# Altium PCB MecaVac.PcbDoc
Units mil, origin at the board's own origin, x right, y up, seen from the top; angles counter-clockwise.
Board outline 6000 x 4000 mil, 2 copper layers (Top Layer, Bottom Layer); 65 components, 40 nets, 194 pads, 0 vias.
Unrouted connection lines stored in the file: 136.
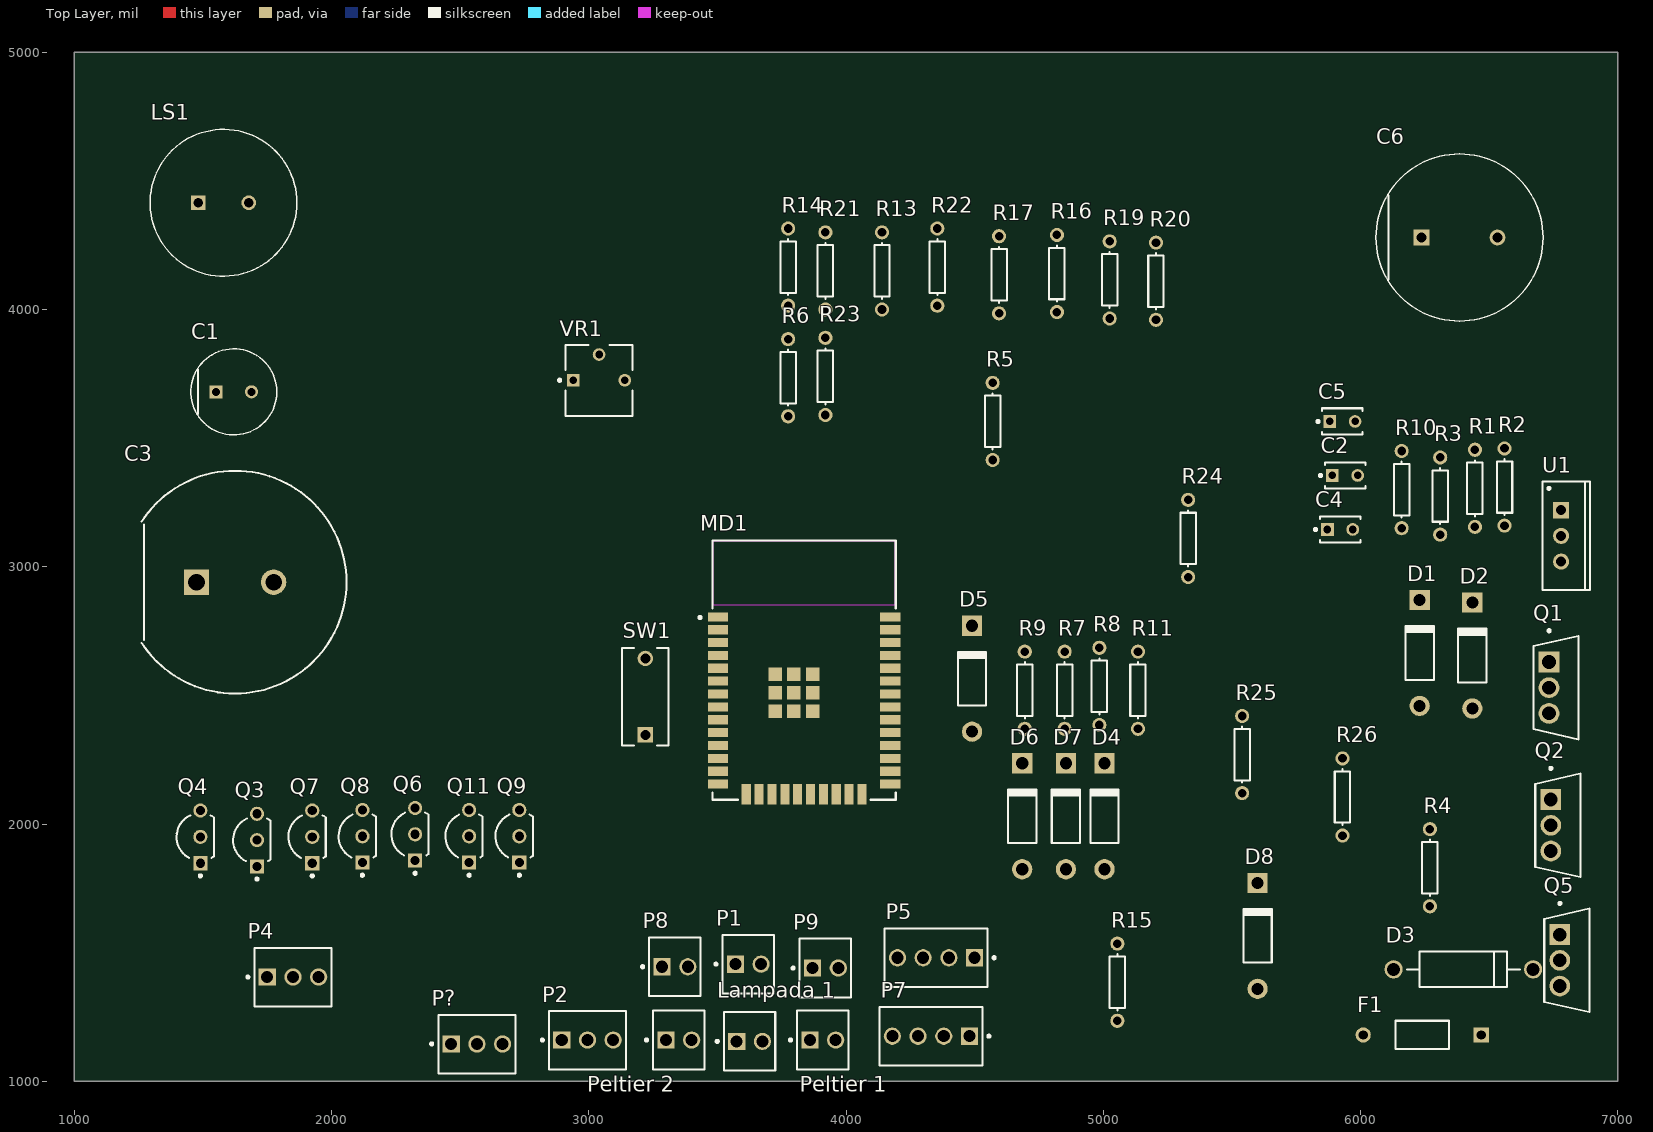
[diagram p0: Top Layer view]
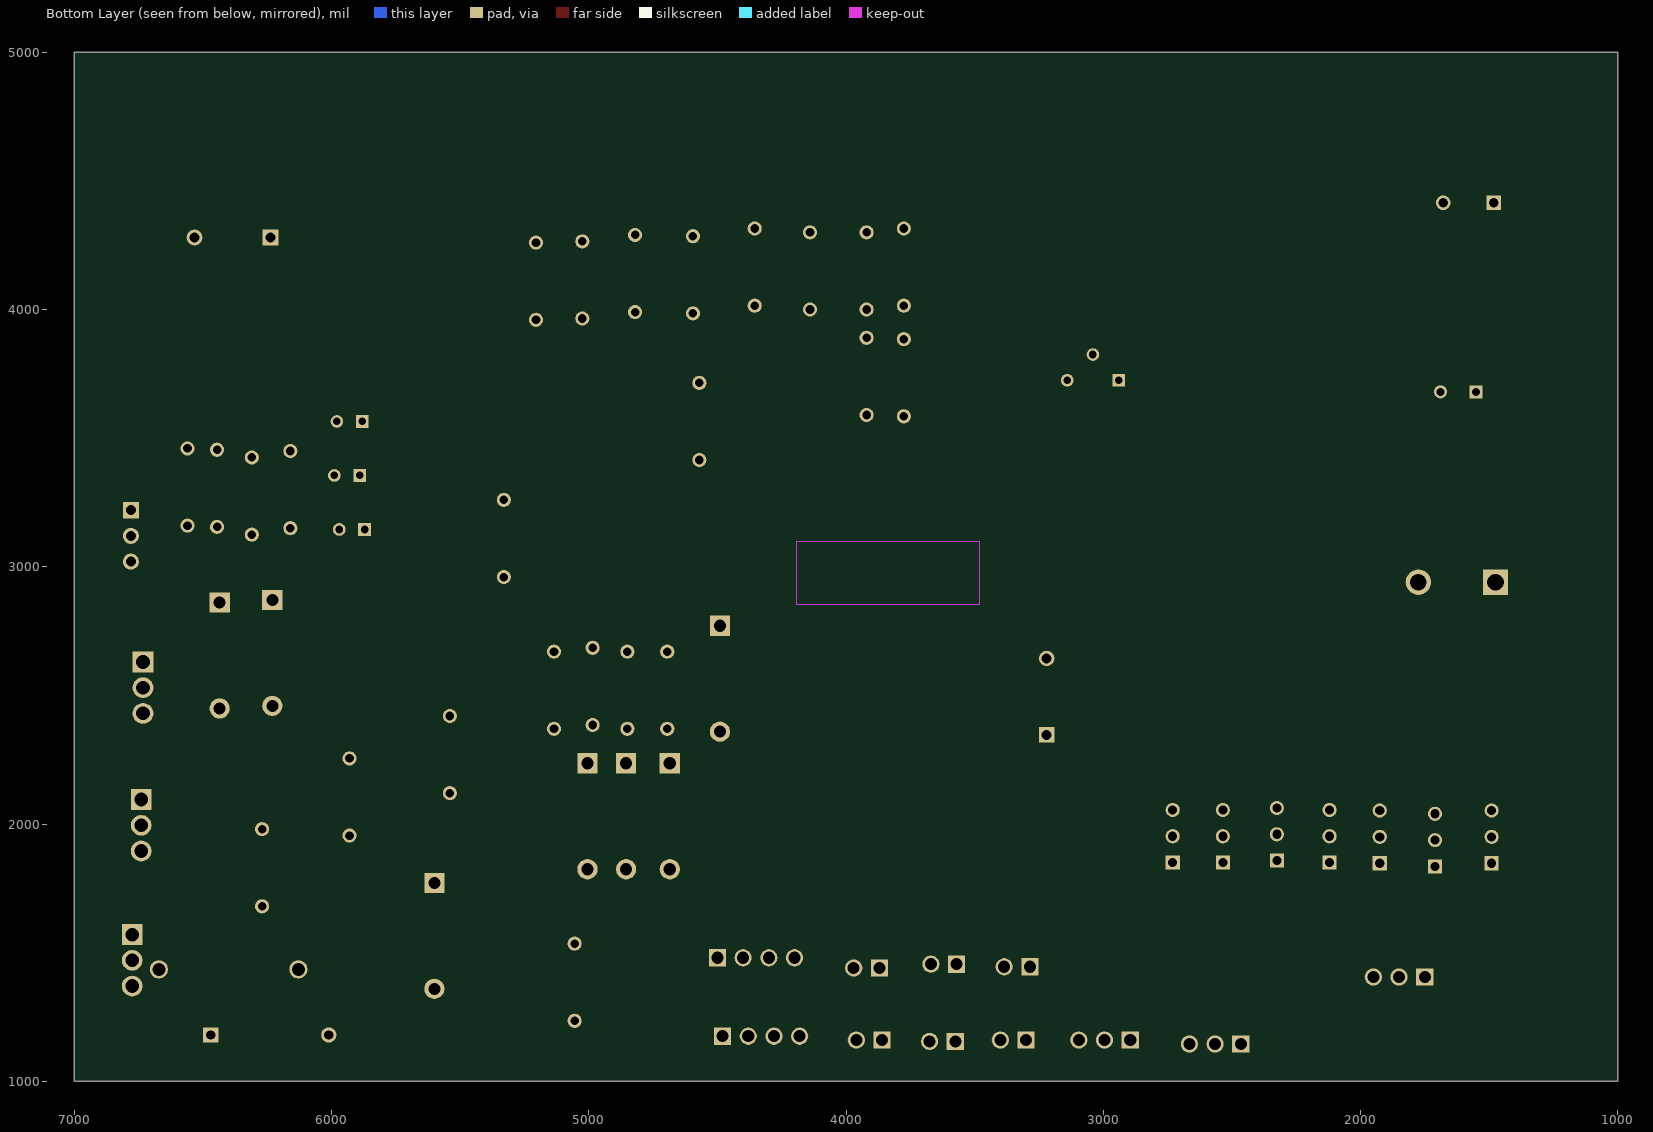
[diagram p1: Bottom Layer view, seen from below]

## Layer stack, top to bottom
Top Solder: solder mask 0.4, Solder Resist, Dk 3.5
Top Layer: signal copper 1.4
Dielectric 1: dielectric 12.6, FR-4, Dk 4.8
Bottom Layer: signal copper 1.4
Bottom Solder: solder mask 0.4, Solder Resist, Dk 3.5

## Board outline
1000,1000 7000,1000 7000,5000 1000,5000

## Design rules (kind name [scope] priority, off if disabled: settings)
Clearance [All] p1: gap=10 ignorepadtopadclearanceinfootprint=FALSE except(0: Arc-Hole Track-Hole SMDPad-Hole THPad-Hole Via-Hole Fill-Hole Poly-Hole Region-Hole Text-Hole)
PolygonConnect [All] p1: connectstyle=Relief reliefconductorwidth=10 reliefentries=4 polygonreliefangle="90 Angle" airgapwidth=10
RoutingVias [All] p1: holewidth=28 width=50 viastyle="Through Hole" minholewidth=28 minwidth=50 maxholewidth=28 maxwidth=50
SolderMaskExpansion [All] p1: expansion=4 istentingtop=FALSE
Width [All] p1: maxlimit=10 minlimit=10 preferedwidth=10
30 further rules are at their usual default settings.

## Components (designator, comment, footprint, x,y, rotation, side; value= is the part's Value field where it differs from the comment)
C1 "100uF" FP-RAD-TH-D_8_0_5-L_11_5-MFG 1620,3680 r0 top
C2 "10uF" VISH-K104K15X7RF5TL2 5940,3355 r0 top
C3 "1F" FP-FR0H105ZF-MFG 1625,2940 r0 top
C4 "10uF" VISH-K104K15X7RF5TL2 5920.79,3145 r0 top
C5 "10uF" VISH-K104K15X7RF5TL2 5930,3565 r0 top
C6 "10mF" FP-RAD-TH-D_16_0_5-L_25_2-MFG 6385,4280 r0 top
D1 "1N4007" DO-41 6230,2665 r90 top
D2 "1N4007" DO-41 6435,2655 r90 top
D3 "P6KE200A" ONSC-SURMETIC40-2-017AA-01 6400,1435 r180 top
D4 "1N4007" DO-41 5005,2030 r90 top
D5 "1N4007" DO-41 4490,2565 r90 top
D6 "1N4007" DO-41 4685,2030 r90 top
D7 "1N4007" DO-41 4855,2030 r90 top
D8 "1N4007" DO-41 5600,1565 r90 top
F1 "Fuse 1" PIN-W2/E2.8 6240,1180 r180 top
"Lampada 1" "22-27-2021" MOLX-22-27-2021_V 3625,1155 r0 top
LS1 "PS1440P02BT" FP-PS1440P02BT-MFG 1580,4415 r0 top
MD1 "ESP32-WROOM-32D" FP-ESP32-WROOM-32D-MFG 3837.13,2598.19 r0 top
P1 "Power" MOLX-22-27-2021_V 3620,1455 r0 top
P2 "Comunicação Processador" MOLX-22-27-2031_V 2995,1160 r0 top
P4 "Sensores Termicos, DS18B20" MOLX-22-27-2031_V 1850,1405 r0 top
P5 "I2C" MOLX-22-27-2041_V 4350,1480 r0 top
P7 "LED" MOLX-22-27-2041_V 4330,1175 r0 top
P8 "Botão" MOLX-22-27-2021_V 3335,1445 r0 top
P9 "Micro Switch" MOLX-22-27-2021_V 3920,1440 r0 top
P? "Sensores Magnéticos" MOLX-22-27-2031_V 2565,1145 r0 top
"Peltier 1" "22-27-2021" MOLX-22-27-2021_V 3910,1160 r0 top
"Peltier 2" "22-27-2021" MOLX-22-27-2021_V 3350,1160 r0 top
Q1 "IRF1404" FP-X15-0364-MFG 6760,2530 r0 top
Q2 "IRF1404" FP-X15-0364-MFG 6766.97,1995 r0 top
Q3 "MPSA56RLRAG" ONSC-TO-92-3-29-11_AM_BL 1710,1937.36 r90 top
Q4 "BC546BZL1G" ONSC-TO-92-3-29-11_AM_BL 1490,1950 r90 top
Q5 "IRF740PBF" FP-X15-0364-MFG 6801.97,1470 r0 top
Q6 "BC546BZL1G" ONSC-TO-92-3-29-11_AM_BL 2325,1960 r90 top
Q7 "BC546BZL1G" ONSC-TO-92-3-29-11_AM_BL 1925,1950 r90 top
Q8 "BC546BZL1G" ONSC-TO-92-3-29-11_AM_BL 2120,1952.36 r90 top
Q9 "BC546BZL1G" ONSC-TO-92-3-29-11_AM_BL 2730,1952.36 r90 top
Q11 "MPSA56RLRAG" ONSC-TO-92-3-29-11_AM_BL 2535,1952.36 r90 top
R1 "Res1" AXIAL-0.3 6445,3305 r90 top value=10K
R2 "Res1" AXIAL-0.3 6560,3310 r90 top value=10K
R3 "Res1" AXIAL-0.3 6310,3275 r90 top value=1K
R4 "Res1" AXIAL-0.3 6270,1830 r90 top value=1K
R5 "Res1" AXIAL-0.3 4570,3565 r90 top value=10k
R6 "Res1" AXIAL-0.3 3775,3735 r90 top value=10k
R7 "Res1" AXIAL-0.3 4850,2520 r90 top value=110~220
R8 "Res1" AXIAL-0.3 4985,2535 r90 top value=110~220
R9 "Res1" AXIAL-0.3 4695,2520 r90 top value=10k
R10 "Res1" AXIAL-0.3 6160,3300 r90 top value=1K
R11 "Res1" AXIAL-0.3 5135,2520 r90 top value=10K
R13 "Res1" AXIAL-0.3 4140,4150 r90 top value=10K
R14 "Res1" AXIAL-0.3 3775,4165 r270 top value=110~1k
R15 "Res1" AXIAL-0.3 5055,1385 r90 top value=10K
R16 "Res1" AXIAL-0.3 4820,4140 r270 top value=330~750
R17 "Res1" AXIAL-0.3 4595,4135 r270 top value=330~750
R19 "Res1" AXIAL-0.3 5025,4115 r90 top value=10K
R20 "Res1" AXIAL-0.3 5205,4110 r90 top value=10K
R21 "Res1" AXIAL-0.3 3920,4150 r90 top value=10k
R22 "Res1" AXIAL-0.3 4355,4165 r270 top value=10K
R23 "Res1" AXIAL-0.3 3920,3740 r90 top value=56
R24 "Res1" AXIAL-0.3 5330,3110 r90 top value=10k
R25 "Res1" AXIAL-0.3 5540,2270 r90 top value=1k
R26 "Res1" AXIAL-0.3 5930,2105 r90 top value=10k
SW1 "BD01" FP-BD01-MFG 3220,2495 r0 top
U1 "LM1117T33" NEB0003A 6780,3120 r270 top
VR1 "1k" BOUR-3362P 3040,3723.62 r0 top

## Footprints (in the part's own frame and the unit in brackets; to place one, negate y for a bottom-side part, rotate by r counter-clockwise, add the part's x,y. Pads: shape width x height; smd on the part's side, far side on the other; paste and mask are expansions set on the pad)
AXIAL-0.3 [mm] "Axial Device, Thru-Hole; 2 Leads; 0.3 in Pin Spacing"
  round 1.4 hole 0.85: 1(-3.81,0) 2(3.81,0)
  silkscreen extent -2.77,-0.76 2.77,0.76
BOUR-3362P [mm] "THD, 3-Leads, Body 6.6x6.99mm, Pitch 2.54mm"
  rect 1.25x1.25 hole 0.75: 1(-2.54,0.035)
  round 1.25 hole 0.75: 2(0,2.575) 3(2.54,0.035)
  silkscreen extent -4.02,-3.49 3.3,3.49, body extent -3.3,-3.49 3.3,3.49, height 4.95
DO-41 [mm] "Diode, Axial; Body 5.2 x 2.7 mm (LxDia. max), Lead Dia. 0.86 mm (max)"
  round 2 hole 1.2: 1(-5.23,0)
  rect 2x2 hole 1.2: 2(5.23,0)
  silkscreen extent -2.65,-1.4 2.75,1.4
FP-BD01-MFG [mm]
  rect 1.52x1.52 hole 0.97 paste-1000 mask+0: 1(0,-3.775)
  round 1.52 hole 0.97 paste-1000 mask+0: 2(0,3.775)
  silkscreen extent -2.28,-4.82 2.28,4.82, body extent -2.38,-4.92 2.38,4.92, height 0.25
FP-ESP32-WROOM-32D-MFG [mm]
  rect 2x0.9 smd paste+0 mask+0: 1(-8.5,5.26) 2(-8.5,3.99) 3(-8.5,2.72) 4(-8.5,1.45) 5(-8.5,0.18) 6(-8.5,-1.09) 7(-8.5,-2.36) 8(-8.5,-3.63) 9(-8.5,-4.9) 10(-8.5,-6.17) 11(-8.5,-7.44) 12(-8.5,-8.71) 13(-8.5,-9.98) 14(-8.5,-11.25) 25(8.5,-11.25) 26(8.5,-9.98) 27(8.5,-8.71) 28(8.5,-7.44) 29(8.5,-6.17) 30(8.5,-4.9) 31(8.5,-3.63) 32(8.5,-2.36) 33(8.5,-1.09) 34(8.5,0.18) 35(8.5,1.45) 36(8.5,2.72) 37(8.5,3.99) 38(8.5,5.26)
  rect 0.9x2 smd paste+0 mask+0: 15(-5.715,-12.25) 16(-4.445,-12.25) 17(-3.175,-12.25) 18(-1.905,-12.25) 19(-0.635,-12.25) 20(0.635,-12.25) 21(1.905,-12.25) 22(3.175,-12.25) 23(4.445,-12.25) 24(5.715,-12.25)
  rect 1.33x1.33 smd paste+0 mask+0: 39(-2.835,-4.075) 39(-2.835,-2.24) 39(-2.835,-0.405) 39(-1,-4.075) 39(-1,-2.24) 39(-1,-0.405) 39(0.835,-4.075) 39(0.835,-2.24) 39(0.835,-0.405)
  Keep-Out Layer region: -9,6.45 9,6.45 9,12.75 -9,12.75
  Keep-Out Layer region: -9,6.45 9,6.45 9,12.75 -9,12.75
  silkscreen extent -10.4,-12.8 9.05,12.8, body extent -9.6,-13.35 9.6,12.9, height 0.25
FP-FR0H105ZF-MFG [mm]
  rect 2.5x2.5 hole 1.65 paste-1000 mask+0: 1(-3.81,0)
  round 2.5 hole 1.65 paste-1000 mask+0: 2(3.81,0)
  silkscreen extent -9.23,-11 11,11, body extent -11.1,-11.1 11.1,11.1, height 0.25
FP-PS1440P02BT-MFG [mm]
  rect 1.45x1.45 hole 0.95 paste-1000 mask+0: 1(-2.5,0)
  round 1.45 hole 0.95 paste-1000 mask+0: 2(2.5,0)
  silkscreen extent -7.25,-7.25 7.25,7.25, body extent -7.35,-7.35 7.35,7.35, height 0.25
FP-RAD-TH-D_8_0_5-L_11_5-MFG [mm]
  rect 1.3x1.3 hole 0.8 paste-1000 mask+0: 1(-1.75,0)
  round 1.3 hole 0.8 paste-1000 mask+0: 2(1.75,0)
  silkscreen extent -4.25,-4.25 4.25,4.25, body extent -4.35,-4.35 4.35,4.35, height 0.25
FP-RAD-TH-D_16_0_5-L_25_2-MFG [mm]
  rect 1.55x1.55 hole 1 paste-1000 mask+0: 1(-3.75,0)
  round 1.55 hole 1 paste-1000 mask+0: 2(3.75,0)
  silkscreen extent -8.25,-8.25 8.25,8.25, body extent -8.35,-8.35 8.35,8.35, height 0.25
FP-X15-0364-MFG [mm]
  rect 2.05x2.05 hole 1.35 paste-1000 mask+0: 1(-0.685,2.54)
  round 2.05 hole 1.35 paste-1000 mask+0: 2(-0.685,0) 3(-0.685,-2.54)
  silkscreen extent -2.22,-5.12 2.22,5.74, body extent -2.42,-5.36 2.42,5.36, height 0.25
MOLX-22-27-2021_V [mm] "Header, 2-Leads, Body 5.8x5.08mm"
  rect 1.7x1.7 hole 1.19: 1(-1.27,0)
  round 1.7 hole 1.19: 2(1.27,0)
  silkscreen extent -3.31,-2.9 2.54,2.9, body extent -2.54,-2.9 2.54,2.9, height 11.72
MOLX-22-27-2031_V [mm] "Header, 3-Leads, Body 7.62x5.8mm, Pitch 2.54mm"
  rect 1.7x1.7 hole 1.19 paste+0: 1(-2.54,0)
  round 1.7 hole 1.19 paste+0: 2(0,0) 3(2.54,0)
  silkscreen extent -4.58,-2.92 3.81,2.88, body extent -3.81,-2.92 3.81,2.88, height 11.71
MOLX-22-27-2041_V [mm] "CONN, 4-Leads, Body 10.16x5.8mm, Pitch 2.54mm"
  rect 1.7x1.7 hole 1.19: 1(3.81,0)
  round 1.7 hole 1.19: 2(1.27,0) 3(-1.27,0) 4(-3.81,0)
  silkscreen extent -5.08,-2.9 5.86,2.9, body extent -5.08,-2.9 5.08,2.9, height 11.7
NEB0003A [mm] "TO, Thru-Hole, Vertical, Heatsink Mounted; 3 In-Line Leads; Pitch 2.54 mm"
  rect 1.6x1.6 hole 1: 1(-2.54,0)
  round 1.6 hole 1: 2(0,0) 3(2.54,0)
  silkscreen extent -5.35,-1.85 5.35,2.85, body extent -4.96,-2.11 4.96,2.43, height 18.66
ONSC-SURMETIC40-2-017AA-01 [mm] "AXIAL, 2-Leads, Diameter 3.49mm"
  round 1.8 hole 1.3: 1(-6.888,0) 2(6.888,0)
  silkscreen extent -5.59,-1.74 5.59,1.74
ONSC-TO-92-3-29-11_AM_BL [mm] "TO, 3-Leads, Body Dia 4.7mm, Pitch 2.6mm"
  rect 1.4x1.4 hole 0.9: 1(-2.6,0)
  round 1.4 hole 0.9: 2(0,0) 3(2.6,0)
  silkscreen extent -3.97,-1.34 2.13,2.35, body extent -2.84,-1.34 2.84,2.35, height 5.33
PIN-W2/E2.8 [mm] "Thru-Hole; 2 Leads"
  rect 1.5x1.5 hole 0.9: 1(-5.825,0)
  round 1.5 hole 0.9: 2(5.825,0)
  silkscreen extent -2.65,-1.4 2.65,1.4
VISH-K104K15X7RF5TL2 [mm] "THD, 2-Leads, Body 4x2.6mm"
  rect 1.25x1.25 hole 0.75: 1(-1.25,0)
  round 1.25 hole 0.75: 2(1.25,0)
  silkscreen extent -2.55,-1.3 2,1.3, body extent -2,-1.3 2,1.3, height 5.6

## Part data
C1: library part CMP-05427-001264-1, "Aluminum Electrolytic Capacitors (Radial Lead Type) AEC-Q200 Qualified 120uF ±20% 35V", Capacitance=120uF, Case/Package=Radial, ESR (Equivalent Series Resistance)=117mR, Leakage Current=3uA, Max Operating Temperature=105°C, Min Operating Temperature=-55°C, Package Quantity=200, Ripple Current=555mA, Tolerance=10%, Voltage=35V, Construction=RADIAL, Contact Plating=Tin, Diameter=8mm, Height=11.5mm, Height - Seated (Max)=0.453inch, Impedance=117mR, Lead Diameter=0.6mm, Lead Free="Lead Free", Lead Pitch=3.5mm, Length=11.5mm, Life (Hours)=2000Hour, Mount="Through Hole", Number of Pins=2, Packaging=Bulk, Polarity=Polar, Radiation Hardening=No, REACH SVHC="No SVHC", Ripple Current (AC)=555mA, RoHS Compliant=Yes, Series=FC, Termination=Radial, Voltage rating=35V, Voltage Rating (DC)=35V
C2 C4 C5: library part CMP-2000-06508-1, "Ceramic Capacitor, 100 nF, +/- 10%, 50 V, -55 to 125 degC, 2-Pin THD, RoHS, Tape and Reel", Capacitance=0.1µF, Manufacturer=Vishay, Operating temperature=-55°C~125°C, Package / Case=Radial, Package Description="2-Pin Through Hole Device, Body 4 x 2.6 mm", Package Reference=K104K15X7RF5TL2, Ratings=-, Standard Package=1, Temperature Coefficient=X7R, Tolerance=±10%, Voltage - Rated=50V, Applications=GeneralPurpose, Catalog Drawings=Mono-KapSide2-15_5.58Mono-KapSide1_15, Category=Capacitors, Datasheet URL=http://www.vishay.com/docs/45171/kseries.pdf, Datasheet Version=08/2013, Family=CeramicCapacitors, Features=-, Height - Seated (Max)="0.220\"(5.58mm)", Lead Spacing="0.098\"(2.50mm)", Lead Style=Straight, Manufacturer URL=http://www.vishay.com/, Mounting Technology=ThroughHole, Mounting Type=ThroughHole, Online Catalog=Mono-Kap™Series, Other Names=BC1084CT, Packaging=CutTape(CT), Series=Mono-Kap™K, Size / Dimension="0.157\"Lx0.098\"W(4.00mmx2.50mm)", Thickness (Max)=-
C3: library part CMP-03024-000003-1, "CAP 1F -20% +80% 5.5V T/H", Manufacturer=KEMET, Manufacturer Part Number=FR0H105ZF, Temperature="-40°C to +85°C", Temperature Range High=+85°C, Temperature Range Low=-40°C, Tolerance=-20/+80%, Voltage rating=5.5V, Automotive=No, Capacitance=1F, Category=Cap, ComponentLink2Description=Datasheet, ComponentLink2URL=https://content.kemet.com/datasheets/KEM_S6016_FR.pdf, Device Class L1="Passive Components", Device Class L2=Capacitors, Device Class L3=Supercapacitors, Digikey Description="CAP 1F -20% +80% 5.5V T/H", Height=22mm, Lead Free=Yes, Mouser Description="Supercapacitors / Ultracapacitors 1F 5.5volts Radial Super Cap", Octopart=https://octopart.com/fr0h105zf-kemet-30531656, Package=FR0H105ZF, RoHS=TRUE
C6: library part CMP-05427-001523-1, "Aluminum Electrolytic Capacitors (Radial Lead Type) AEC-Q200 Qualified 10000uF ±20% 10V", Case/Package=Radial, Max Operating Temperature=105°C, Min Operating Temperature=-55°C, Package Quantity=100, Ripple Current=1.89A, Tolerance=20%, Voltage=10V, Capacitance=10mF, Construction=RADIAL, Diameter=16mm, Height=25mm, Height - Seated (Max)=1.063inch, Lead Diameter=0.8mm, Lead Pitch=7.5mm, Lead/Base Style=Straight, Length=25mm, Life (Hours)=2000Hour, Mount="Through Hole", Packaging=Bulk, REACH SVHC="No SVHC", Ripple Current (AC)=1.89A, RoHS Compliant=Yes, Series=HD, Termination=Radial, Voltage rating=10V, Voltage Rating (DC)=10V
D1 D2 D4 D5 D6 D7 D8: library part "Diode 1N4007", "1 Amp General Purpose Rectifier", Code_JEDEC=DO-204-AL, ComponentLink1Description="Manufacturer Link", ComponentLink1URL=http://www.fairchildsemi.com/, ComponentLink2Description=Datasheet, ComponentLink2URL=http://www.fairchildsemi.com/ds/1N%2F1N4001.pdf, DatasheetVersion=1998, LatestRevisionDate=17-Jul-2002, LatestRevisionNote="Re-released for DXP Platform.", PackageDescription="Diode, Axial; Body 5.2 x 2.7 mm (LxDia. max), Lead Dia. 0.86 mm (max)", PackageReference=DO-41, PackageVersion=Aug-1999, Published=8-Jun-2000, Publisher="Altium Limited"
D3: library part CMP-1061-00677-1, "600 W Peak Power Transient Voltage Suppressor, 2-Pin Surmetic(TM) 40, Bulk Box", Manufacturer="On Semiconductor", ComponentLink1Description="Manufacturer URL", ComponentLink1URL=http://www.onsemi.com/, ComponentLink2Description=Datasheet, ComponentLink2URL=http://www.onsemi.com/pub_link/Collateral/P6KE6.8A-D.PDF, ComponentLink3Description="Package Specification", ComponentLink3URL=http://www.onsemi.cn/pub_link/Collateral/017AA.PDF, DatasheetVersion="Rev. 10", Direction=Unidirectional, IR Max (uA)=5, Mounting Technology="Through Hole", PackageDescription="2-Pin, Axial Lead, Diameter 3.49 mm", PackageReference=SURMETIC40-2-017AA-01, PackageVersion="Rev. O, 09/2005", Packing="Bulk Box", PartNumber=P6KE200A, PPK Max (W)=600, V(BR) Typ (V)=200
F1: "Fuse", LatestRevisionDate=17-Jul-2002, LatestRevisionNote="Re-released for DXP Platform.", PackageDescription="Thru-Hole; 2 Leads", PackageReference=PIN-W2/E2.8, Published=8-Jun-2000, Publisher="Altium Limited"
"Lampada 1" "Peltier 1" "Peltier 2": library part CMP-2000-05537-1, "Male Header, Pitch 2.54 mm, 1 x 2 Position, Height 11.7 mm, Tail Length 3.56 mm, 0 to 75 degC, RoHS, Bulk", Current - Max=4A, Manufacturer=Molex, Operating temperature=0°Cto+75°C, Package Description="2-Leads Header, Body 5.08 x 5.8 mm, Pitch 2.54 mm", Package Version="Rev. BC, 02/2012", PartNumber=0022272021, Voltage - Max=250V, Contact material=Tinplatedbrass, Current rating=4A, Datasheet URL=http://www.molex.com/pdm_docs/sd/022272021_sd.pdf, Datasheet Version="Rev. F, 06/2009", Housing material=Nylon(UL94V-0), Manufacturer URL=http://www.molex.com/, Mounting Technology=ThroughHole, No. of Positions=2, No. of Rows=1, Orientation=Vertical, Package Reference=22-27-2021, Pitch=2.54mm, Voltage rating=250V
LS1: library part CMP-08413-000003-1, "AUDIO PIEZO TRANSDUCER 30V TH", Frequency=4kHz, Max Operating Temperature=70°C, Min Operating Temperature=-10°C, Operating Supply Voltage=3V, Package Quantity=350, Diameter=14mm, Height=8mm, Lead Free="Lead Free", Mount="Through Hole", Number of Terminals/Pins=2, Packaging="Tape and Reel", RoHS Compliant=Yes, Self Resonant Frequency=4kHz, Termination="PC Pins", Voltage Rating (DC)=3V, Washable=No
MD1: library part CMP-194065-000003-1, "WIFI MODULE 32MBITS SPI FLASH", Manufacturer="Espressif Systems", Max Frequency=2484MHz, Max Supply Voltage=3.6V, Min Supply Voltage=3V, Nominal Supply Current=500mA, Temperature="-40°C to +85°C", Temperature Range High=+85°C, Temperature Range Low=-40°C, Automotive=No, Bandwidth=72MHz, Category=UNK, ComponentLink2Description=Datasheet, ComponentLink2URL=https://www.espressif.com/sites/default/files/documentation/esp32-wroom-32d_esp32-wroom-32u_datasheet_en.pdf, Data Rate=150Mbits/s, Device Class L1="Integrated Circuits (ICs)", Device Class L2="RF Semiconductors and Devices", Device Class L3=Transceivers, Digikey Description="WIFI MODULE 32MBITS SPI FLASH", Height=3.2mm, Interface=I2C,SPI,UART,Ethernet,I2S,Other, Lead Free=Yes, Manufacturer Part Number=ESP32-WROOM-32D, Mouser Description="Wi-Fi/BT BLE Module ESP32-D0WD, SPI Flash, UART, P", Number Of Adc Channels=16, Number Of Gpio=32, Octopart=https://octopart.com/esp32-wroom-32d-espressif+systems-91040050, Package=ESP32-WROOM-32D, RoHS=TRUE, Sensitivity=-98dBm
P1 P8 P9: library part CMP-2000-05537-1, "Male Header, Pitch 2.54 mm, 1 x 2 Position, Height 11.7 mm, Tail Length 3.56 mm, 0 to 75 degC, RoHS, Bulk", Current - Max=4A, Manufacturer=Molex, Operating temperature=0°Cto+75°C, Package Description="2-Leads Header, Body 5.08 x 5.8 mm, Pitch 2.54 mm", Package Reference=22-27-2021, Package Version="Rev. BC, 02/2012", PartNumber=0022272021, Voltage - Max=250V, Contact material=Tinplatedbrass, Current rating=4A, Datasheet URL=http://www.molex.com/pdm_docs/sd/022272021_sd.pdf, Datasheet Version="Rev. F, 06/2009", Housing material=Nylon(UL94V-0), Manufacturer URL=http://www.molex.com/, Mounting Technology=ThroughHole, No. of Positions=2, No. of Rows=1, Orientation=Vertical, Pitch=2.54mm, Voltage rating=250V
P2 P4 P?: library part CMP-2000-05538-1, "Male Header, Pitch 2.54 mm, 1 x 3 Position, Height 11.7 mm, Tail Length 3.56 mm, -40 to 80 degC, RoHS, Bulk", Current rating=4A, Manufacturer=Molex, Operating temperature=0°Cto+75°C, Package Description="Male Header, Pitch 2.54 mm, 1 x 3 Position, Height 11.7 mm, Tail Length 3.56 mm", Package Reference=22-27-2031, Voltage rating=250V, Contact material=Tinplatedbrass, Datasheet URL=http://www.molex.com/webdocs/datasheets/pdf/en-us/0022272031_PCB_HEADERS.pdf, Datasheet Version=06/2016, Housing material=Nylon(UL94V-0), Manufacturer URL=http://www.molex.com/, Mounting Technology=ThroughHole, Package URL=http://www.molex.com/pdm_docs/sd/022272031_sd.pdf
P5 P7: library part CMP-2000-05243-1, "Male Header, Pitch 2.54 mm, 1 x 4 Position, Height 11.7 mm, Tail Length 3.56 mm, RoHS, Bulk", Current rating=4A, Manufacturer=Molex, Operating temperature=0degCto+75degC, Voltage rating=250V, Contact material=Tinplatedbrass, Datasheet URL=http://www.molex.com/pdm_docs/sd/022272041_sd.pdf, Datasheet Version="Rev. F, 06/2009", Housing material=Nylon(UL94V-0), Manufacturer URL=http://www.molex.com/
Q1 Q2: library part CMP-02550-000088-1, "MOSFET N-CH 400V 10A TO-220AB", Continuous Drain Current=10A, Drain To Source Breakdown Voltage=400V, Drain To Source Resistance=0.55Ω, Gate To Source Voltage=20V, Input Capacitace At Vds="1400pF @ 25V", Manufacturer=Vishay, Manufacturer Part Number=IRF740PBF, Max Forward Diode Voltage=2V, Max Junction Temp=+150°C, Package=X15-0364, Power Dissipation=125W, Pulse Drain Current=40A, Temperature="-55°C to +150°C", Temperature Range Low=-55°C, Automotive=No, Category=Trans, ComponentLink2Description=Datasheet, ComponentLink2URL=http://www.vishay.com/docs/91054/91054.pdf, Depletion Mode=False, Device Class L1="Discrete Semiconductors", Device Class L2=Transistors, Device Class L3=MOSFETs, Digikey Description="MOSFET N-CH 400V 10A TO-220AB", Drain To Source Voltage=400V, Gate Charge At Vgs="63nC @ 10V", Height=19.89mm, Lead Free=Yes, Mouser Description="MOSFET N-Chan 400V 10 Amp", Number Of Channels=1, Number Of N Channels=1, Octopart=https://octopart.com/irf740pbf-vishay-46527100, Reverse Recovery Charge=3800nC, Reverse Recovery Time=370ns, RoHS=TRUE, Rthja Max=62°C/W, Standoff Height=3.33mm, Temperature Range High=+150°C, Threshold Vgs Max=4V, Threshold Vgs Min=2V, Turn Off Delay Time=50ns, Turn On Delay Time=14ns
Q3 Q11: library part CMP-1048-01494-1, "80 V, 0.5 A, Amplifier Transistor, PNP Transistor, 3-Pin TO-92, Pb-Free, Tape and Reel", Manufacturer="On Semiconductor", ComponentLink1Description="Manufacturer URL", ComponentLink1URL=http://www.onsemi.com/, ComponentLink2Description=Datasheet, ComponentLink2URL=http://www.onsemi.cn/pub_link/Collateral/MPSA05-D.PDF, ComponentLink3Description="Package Specification", ComponentLink3URL=http://www.onsemi.com/pub_link/Collateral/MAC97-D.PDF, DatasheetVersion="Rev. 3", fT Min (MHz)=50, IC Continuous (A)=0.5, Mounting Technology="Through Hole", PackageDescription="3-Pin Transistor Outline, Body 4.825 x 3.685 mm, Pitch 1.27 mm", PackageReference=TO-92-3-29-11_AM_BL, PackageVersion="Rev. AM", Packing="Tape and Reel", PartNumber=MPSA56RLRAG, Polarity=PNP, RoHS=TRUE
Q4 Q6 Q7 Q8 Q9: library part CMP-1048-01594-1, "Amplifier Transistor, NPN Silicon, 3-Pin TO-92, Pb-Free, Ammo Box", Manufacturer="On Semiconductor", ComponentLink1Description="Manufacturer URL", ComponentLink1URL=http://www.onsemi.com/, ComponentLink2Description=Datasheet, ComponentLink2URL=http://www.onsemi.com/pub_link/Collateral/BC546-D.PDF, ComponentLink3Description="Package Specification", ComponentLink3URL=http://www.onsemi.com/pub_link/Collateral/MAC97-D.PDF, DatasheetVersion="Rev. 7", fT Min (MHz)=150, IC Continuous (A)=0.1, Mounting Technology="Through Hole", PackageDescription="3-Pin Transistor Outline, Body 4.825 x 3.685 mm, Pitch 1.27 mm", PackageReference=TO-92-3-29-11_AM_BL, PackageVersion="Rev. AM", Packing="Ammo Box", PartNumber=BC546BZL1G, Polarity=NPN, RoHS=TRUE
Q5: library part CMP-02550-000088-1, "MOSFET N-CH 400V 10A TO-220AB", Continuous Drain Current=10A, Drain To Source Breakdown Voltage=400V, Drain To Source Resistance=0.55Ω, Gate To Source Voltage=20V, Input Capacitace At Vds="1400pF @ 25V", Manufacturer=Vishay, Max Forward Diode Voltage=2V, Max Junction Temp=+150°C, Package=X15-0364, Power Dissipation=125W, Pulse Drain Current=40A, Temperature="-55°C to +150°C", Temperature Range Low=-55°C, Automotive=No, Category=Trans, ComponentLink2Description=Datasheet, ComponentLink2URL=http://www.vishay.com/docs/91054/91054.pdf, Depletion Mode=False, Device Class L1="Discrete Semiconductors", Device Class L2=Transistors, Device Class L3=MOSFETs, Digikey Description="MOSFET N-CH 400V 10A TO-220AB", Drain To Source Voltage=400V, Gate Charge At Vgs="63nC @ 10V", Height=19.89mm, Lead Free=Yes, Manufacturer Part Number=IRF740PBF, Mouser Description="MOSFET N-Chan 400V 10 Amp", Number Of Channels=1, Number Of N Channels=1, Octopart=https://octopart.com/irf740pbf-vishay-46527100, Reverse Recovery Charge=3800nC, Reverse Recovery Time=370ns, RoHS=TRUE, Rthja Max=62°C/W, Standoff Height=3.33mm, Temperature Range High=+150°C, Threshold Vgs Max=4V, Threshold Vgs Min=2V, Turn Off Delay Time=50ns, Turn On Delay Time=14ns
R1 R2 R3 R4 R5 R6 R7 R8 R9 R10 R11 R13 R14 R15 R16 R17 R19 R20 R21 R22 R23 R24 R25 R26: "Resistor", LatestRevisionDate=17-Jul-2002, LatestRevisionNote="Re-released for DXP Platform.", PackageDescription="Axial Device, Thru-Hole; 2 Leads; 0.3 in Pin Spacing", PackageReference=AXIAL-0.3, Published=8-Jun-2000, Publisher="Altium Limited"
SW1: library part CMP-10033-000004-1, "SWITCH SLIDE DIP SPST 100MA 5V", Capacitance=5pF, Case/Package=DIP, Contact Current Rating=25mA, Current rating=100mA, Max Operating Temperature=85°C, Max Voltage Rating (DC)=25V, Min Operating Temperature=-40°C, Package Quantity=115, Voltage Rating (DC)=5V, Actuator Length=0.9mm, Actuator Material=Nylon, Actuator Type="Slide (Standard)", Approvals=UL, Body Material=PBT, Contact material=Bronze, Contact Plating=Gold, Depth=9.65mm, Electrical Life=10000Cycles, Lead Free="Lead Free", Length=0.18inch, Life (Cycles)=10000Cycles, Material=Nylon, Max Current Rating=100mA, Mechanical Life=10000Cycles, Mount="Through Hole", Number of Circuits=1, Number of Poles=1, Number of Positions=1, Orientation=Straight, Packaging=Rail/Tube, Pitch=0.1inch, Radiation Hardening=No, REACH SVHC="No SVHC", RoHS Compliant=Yes, Series=BD, Terminal Pitch=2.54mm, Termination="PC Pin", Throw Configuration=SPST, Washable=Yes, Width=9.65mm
U1: library part CMP-0066-00347-4, "Precision Centigrade Temperature Sensor, 3-pin TO-220", Manufacturer="Texas Instruments", PackageTopMarking=NSUZXYTTE#*LM35DT, PowerWise=N, Code_JEDEC=TO-220-AB, ComponentLink1Description="Datasheet URL", ComponentLink1URL=http://www.ti.com/general/docs/lit/getliterature.tsp?genericPartNumber=LM35&fileType=pdf, CompType="Temp Sensor IC", PackageDescription="TO-220, Molded, 3 Lead, Auto L/F", PackageReference=NEB0003A, PinCount=3, RoHS=N
VR1: library part CMP-1747-00003-1, "Square Trimpot(R) Trimming Potentiometer, 100 KOhm, 300 V, -55 to 125 degC, 3-Pin THD, RoHS, Tube", Case\Package=Axial, Max Operating Temperature="155 degC", Min Operating Temperature="-55 degC", Package Quantity=200, Power Rating="250 mW", Resistance="1 mohm", Tolerance=1%, Voltage rating="250 V", ComponentLink1Description="Manufacturer URL", ComponentLink1URL=http://www.bourns.com/, ComponentLink2Description=Datasheet, ComponentLink2URL=http://www.bourns.com/docs/Product-Datasheets/3362.pdf, DatasheetVersion=May-16, Length="0.248 inch", Mount="Through Hole", PackageDescription="3-Pin Through Hole Device, Body 6.6 x 6.99 mm, Pitch 2.54 mm", PackageReference=3326P, Packaging=Bulk, RoHSCompliant=true

## Nets (pads, with @x,y where several pads share a name; then routed paths per layer and width w, separated by ;. In a path a pad name is that pad's centre, name@x,y a point inside that pad or via, vN(x,y) a via of type N, cw(c..) or ccw(c..) an arc to the next point about the centre after c; other vN are vias at no path point)
+3.3V: C3.2 C4.2 D8.1 MD1.2 P4.3 P5.4 P8.1 P9.1 R2.2 R10.1 R19.2 R20.2 U1.3
+12V: "Lampada 1.2" "Peltier 1.2" "Peltier 2.1" C1.2 C2.2 C5.2 C6.2 D3.1 D4.2 D6.2 D7.2 D8.2 F1.1 Q3.1 Q11.1 R6.2 R16.1 R17.1 R24.2 R26.2 U1.1 VR1.3
GND: C1.1 C2.1 C3.1 C4.1 C5.1 C6.1 D1.1 D2.1 D3.2 D4.1 D5.1 MD1.1 MD1.15 MD1.38 MD1.39 P1.2 P2.1 P4.1 P5.1 P7.1 P7.2 Q1.3 Q2.3 Q4.3 Q5.3 Q6.3 Q7.3 R1.2 R5.2 R9.1 R11.1 R13.2 R15.1 R21.2 R22.1 R25.1 SW1.1 U1.2
NetD1_2: "Peltier 1.1" D1.2 D7.1 Q1.2
NetD2_2: "Peltier 2.2" D2.2 D6.1 Q2.2
NetD5_2: "Lampada 1.1" D5.2 Q5.2
NetF1_2: F1.2 P1.1
NetLS1_1: LS1.1 R14.1
NetLS1_2: LS1.2 Q7.1
NetMD1_3: MD1.3 R2.1 SW1.2
NetMD1_8: MD1.8 R8.2
NetMD1_10: MD1.10 P?.1 R11.2
NetMD1_11: MD1.11 P?.2 R13.1
NetMD1_12: MD1.12 P8.2 R15.2
NetMD1_13: MD1.13 Q9.2
NetMD1_14: MD1.14 P9.2 R22.2
NetMD1_16: MD1.16 Q8.2
NetMD1_23: MD1.23 R24.1 R25.2
NetMD1_27: MD1.27 R3.2
NetMD1_28: MD1.28 Q7.2
NetMD1_30: MD1.30 P4.2
NetMD1_33: MD1.33 P5.2 R19.1
NetMD1_34: MD1.34 P2.3
NetMD1_35: MD1.35 P2.2
NetMD1_36: MD1.36 P5.3 R20.1
NetP7_3: P7.3 Q9.3
NetP7_4: P7.4 Q8.3
NetP?_3: P?.3 R10.2
NetQ1_1: Q1.1 Q2.1 R1.1 R23.2
NetQ3_2: Q3.2 R4.2 R6.1
NetQ3_3: Q3.3 R23.1
NetQ4_1: Q4.1 R4.1
NetQ4_2: Q4.2 R3.1 R5.1
NetQ5_1: Q5.1 Q11.3 R9.2
NetQ6_1: Q6.1 R7.1
NetQ6_2: Q6.2 R8.1 R21.1
NetQ8_1: Q8.1 R16.2
NetQ9_1: Q9.1 R17.2
NetQ11_2: Q11.2 R7.2 R26.1
NetR14_2: R14.2 VR1.1 VR1.2
pads on no net: MD1.4 MD1.5 MD1.6 MD1.7 MD1.9 MD1.17 MD1.18 MD1.19 MD1.20 MD1.21 MD1.22 MD1.24 MD1.25 MD1.26 MD1.29 MD1.31 MD1.32 MD1.37